# Altium PCB teensy_base.PcbDoc
Units mil, origin at the board's own origin, x right, y up, seen from the top; angles counter-clockwise.
Board outline 3937.01 x 3149.61 mil, 2 copper layers (Top, Bottom); 7 components, 8 nets, 116 pads, 0 vias.
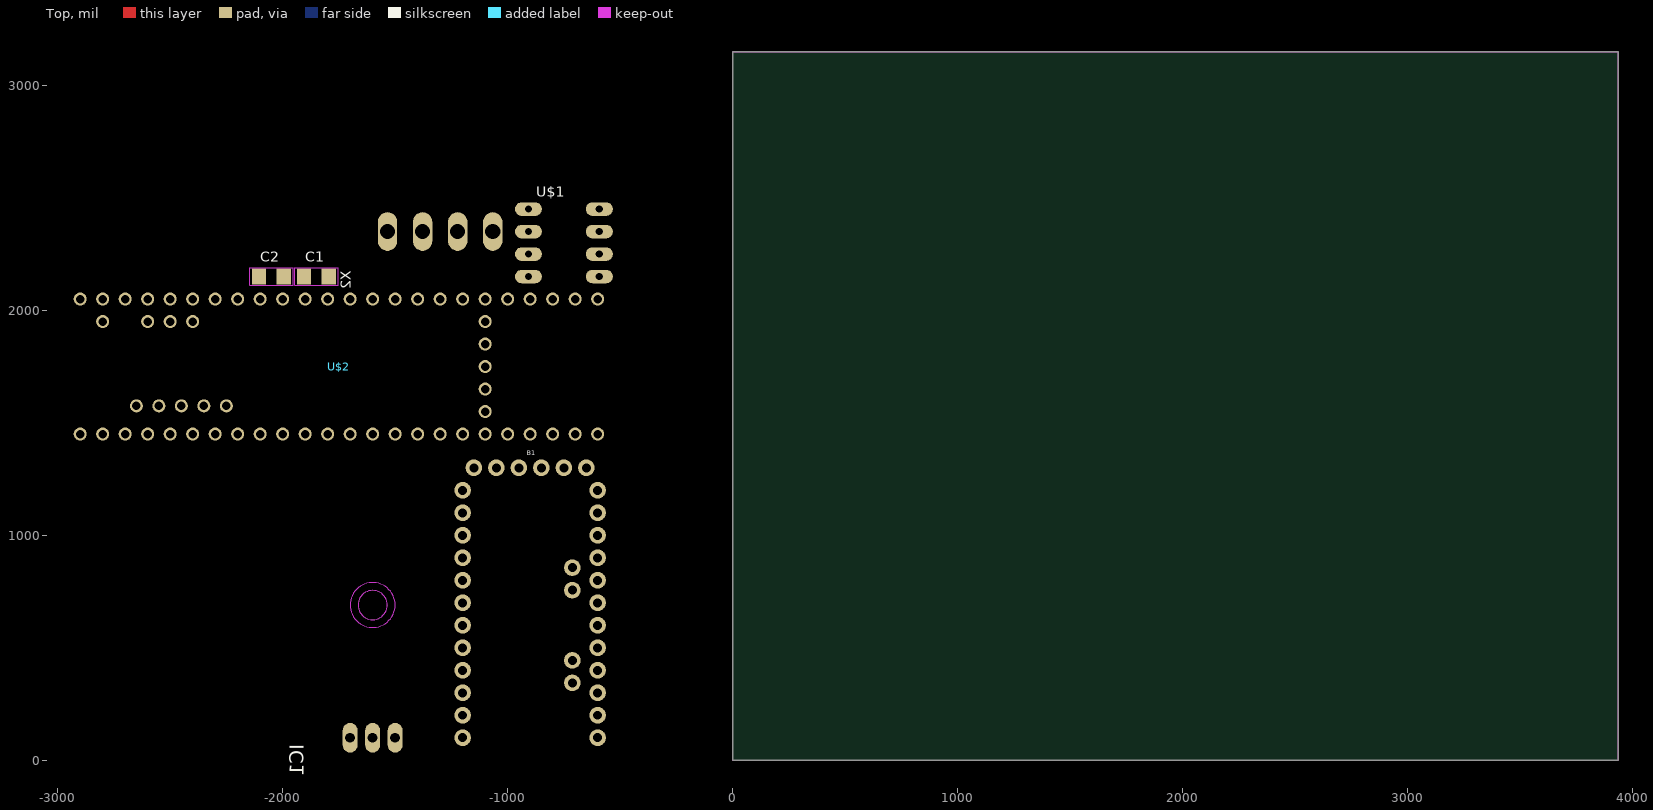
[diagram p0: Top view]
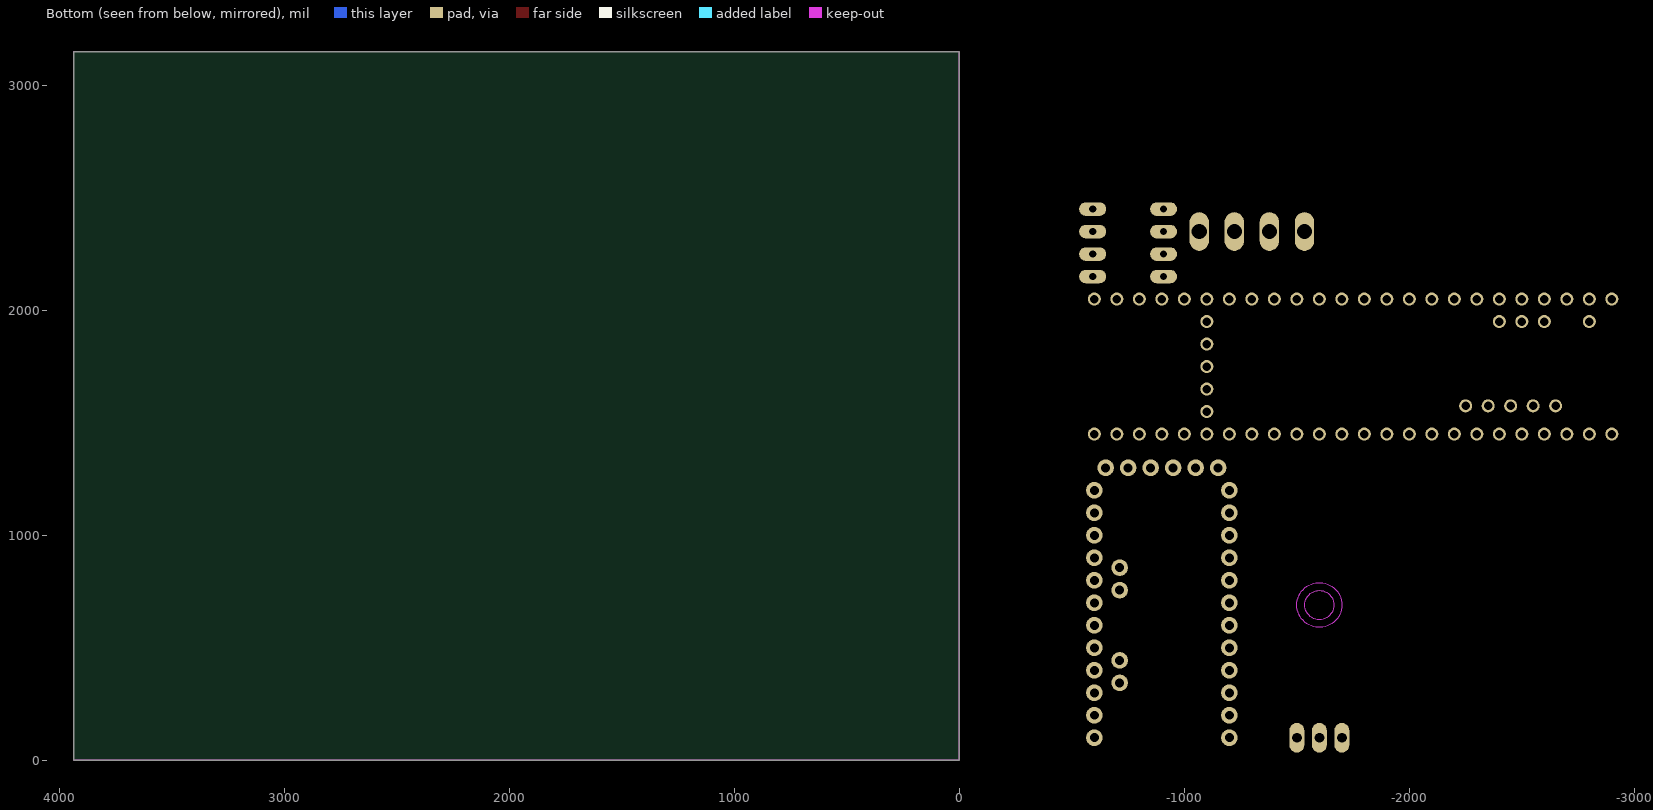
[diagram p1: Bottom view, seen from below]

## Layer stack, top to bottom
Top Solder: solder mask 0.4, Solder Resist, Dk 3.5
Top: signal copper 1.378
Dielectric 1: dielectric 12.6, FR-4, Dk 4.8
Bottom: signal copper 1.378
Bottom Solder: solder mask 0.4, Solder Resist, Dk 3.5

## Board outline
0,3149.61 0,0 3937.01,0 3937.01,3149.61
cut-out: -1600,625 ccw(c-1600,690) -1535,690 ccw(c-1600,690) -1600,755 ccw(c-1600,690) -1665,690 ccw(c-1600,690)

## Design rules (kind name [scope] priority, off if disabled: settings)
BoardOutlineClearance mdCopperDimension [All] p1: gap=10 ignorepadtopadclearanceinfootprint=FALSE except(0: Arc-SplitContinuation Track-SplitContinuation SMDPad-SplitContinuation THPad-SplitContinuation Via-SplitContinuation Fill-SplitContinuation Poly-SplitContinuation Region-SplitContinuation Text-SplitContinuation; 40: Poly-OutlineEdge Poly-CavityEdge Poly-CutoutEdge Poly-SplitBarrior)
Clearance "Clearance (Same Net)" [All] p1: gap=6 ignorepadtopadclearanceinfootprint=FALSE
Clearance [All] p2: gap=6 ignorepadtopadclearanceinfootprint=FALSE
HoleSize [All] p1: absolutevalues=TRUE maxlimit=100000 minlimit=13.78 maxpercent=80.000 minpercent=20.000
HoleToHoleClearance mdDrill [All] p1: gap=6 allowstackedmicrovias=TRUE
MinimumSolderMaskSliver [All] p1 off: minsoldermaskwidth=10
PasteMaskExpansion mlMinCreamFrame [All] p1: expansion=0
PolygonConnect ThermalVias [IsVia] p1: connectstyle=Direct reliefconductorwidth=10 reliefentries=4 polygonreliefangle="90 Angle" airgapwidth=10
PolygonConnect [All] p2: connectstyle=Relief reliefconductorwidth=10 reliefentries=4 polygonreliefangle="90 Angle" airgapwidth=10
RoutingVias [All] p1: holewidth=13.78 width=29.78 viastyle="Through Hole" minholewidth=13.78 minwidth=29.78 maxholewidth=100 maxwidth=100
SolderMaskExpansion mlMinStopFrame [All] p1: expansion=4 istentingtop=FALSE
Width [All] p1: maxlimit=10 minlimit=6 preferedwidth=6
26 further rules are at their usual default settings.

## Components (designator, comment, footprint, x,y, rotation, side; value= is the part's Value field where it differs from the comment)
B1 "ARDUINO_PRO_MINI" ARDUINO_PRO_MINI -900,700 r0 top
C1 "" C1206 -1850,2150 r0 top
C2 "" C1206 -2050,2150 r0 top
IC1 "7805T" TO220H -1600,500 r0 top
U$1 "" MCP2561_PDIP -750,2300 r0 top
U$2 "" TEENSY_3.5/3.6 -1800,1750 r0 top
X2 "" KK-156-4 -1300,2350 r0 top

## Footprints (in the part's own frame and the unit in brackets; to place one, negate y for a bottom-side part, rotate by r counter-clockwise, add the part's x,y. Pads: shape width x height; smd on the part's side, far side on the other; paste and mask are expansions set on the pad)
ARDUINO_PRO_MINI [mil] "ARDUINO_PRO_MINI"
  round 74 hole 40: 1(-300,500) 2(-300,400) 3(-300,300) 4(-300,200) 5(-300,100) 6(-300,0) 7(-300,-100) 8(-300,-200) 9(-300,-300) 10(-300,-400) 11(-300,-500) 12(-300,-600) 13(300,-600) 14(300,-500) 15(300,-400) 16(300,-300) 17(300,-200) 18(300,-100) 19(300,0) 20(300,100) 21(300,200) 22(300,300) 23(300,400) 24(300,500) A4(187.5,56.25) A5(187.5,156.25) A6(187.5,-356.25) A7(187.5,-256.25) BLK(-250,600) GND(-150,600) GRN(250,600) RXI(50,600) TXO(150,600) VCC(-50,600)
C1206 [mil] "C1206"
  rect 62.99x70.87 smd: 1(-55.12,0) 2(55.12,0)
  Top keep-out lines w2: -97.36,-38.7 -97.36,38.7 97.36,38.7 97.36,-38.7 -97.36,-38.7
KK-156-4 [mil] "KK-156-4"
  oval 86x172 hole 66.93: 1(-233.86,0) 2(-77.95,0) 3(77.95,0) 4(233.86,0)
MCP2561_PDIP [mil] "MCP2561_PDIP"
  oval 120x60 hole 32: CANH(157.48,50) CANL(157.48,-50) RXD(-157.48,-150) SPLIT(157.48,-150) STBY(157.48,150) TXD(-157.48,150) VDD(-157.48,-50) VSS(-157.48,50)
TEENSY_3.5/3.6 [mil] "TEENSY_3.5/3.6"
  round 58 hole 38: 0/RX(-1000,-300) 1/TX(-900,-300) 2(-800,-300) 3/CANTX(-700,-300) 3V3(300,-300) 3V3_2(700,-100) 3V3_LO(-900,300) 4/CANRX(-600,-300) 5(-500,-300) 6(-400,-300) 7(-300,-300) 8(-200,-300) 9/CS(-100,-300) 10/CS(0,-300) 11/MOSI(100,-300) 12/MISO(200,-300) 13/SCK(200,300) 14/A0(100,300) 15/A1(0,300) 16/A2(-100,300) 17/A3(-200,300) 18/A4/SDA(-300,300) 19/A5/SCL(-400,300) 20/A6(-500,300) 21/A7(-600,300) 21/DAC0(500,300) 22/A8(-700,300) 23/A9(-800,300) 24(400,-300) 25(500,-300) 26(600,-300) 27(700,-300) 28(800,-300) 29(900,-300) 30(1000,-300) 31/A12(1100,-300) 32/A13(1200,-300) 33/A14(1200,300) 34/A15(1100,300) 35/A16(1000,300) 36/A17(900,300) 37/A18(800,300) 38/A19(700,300) 39/A20(600,300) A10(-700,200) A11(-600,200) A22/DAC1(400,300) AGND(-1000,300) AREF(-800,200) GND(-1100,-300) GND2(300,300) GND3(700,0) PROG(700,100) RESET(700,200) U5V(-850,-175) UD+(-650,-175) UD-(-750,-175) UGND1(-550,-175) UGND2(-450,-175) VBAT(700,-200) VIN(-1100,300) VUSB(-1000,200)
TO220H [mil] "TO220H"
  oval 66x132 hole 44: 1(-100,-400) 2(0,-400) 3(100,-400)
  Top keep-out circle w0: c0,190 r100
  Bottom keep-out circle w0: c0,190 r100

## Part data
C1 C2: library part C1206, PackageName=C1206
IC1: library part TO220H, PackageName=TO220H
U$1: library part MCP2561_PDIP, PackageName=MCP2561_PDIP
U$2: library part TEENSY_3.5/3.6, PackageName=TEENSY_3.5/3.6
X2: library part KK-156-4, PackageName=KK-156-4
B1: PackageName=ARDUINO_PRO_MINI

## Free pads (board coordinates)
  round 130 hole 130 unplated: MH1(-1600,690)

## Nets (pads, with @x,y where several pads share a name; then routed paths per layer and width w, separated by ;. In a path a pad name is that pad's centre, name@x,y a point inside that pad or via, vN(x,y) a via of type N, cw(c..) or ccw(c..) an arc to the next point about the centre after c; other vN are vias at no path point)
+5V: B1.21 C2.1 IC1.3 U$1.VDD U$2.VIN
+12V: C1.1 IC1.1 X2.1
GND: B1.4 B1.23 C1.2 C2.2 IC1.2 U$1.STBY U$1.VSS U$2.AGND U$2.GND X2.2
N$1: U$1.RXD U$2.4/CANRX
N$2: U$1.TXD U$2.3/CANTX
N$5: U$1.CANH X2.3
N$6: U$1.CANL X2.4
RAW: B1.24
pads on no net: B1.1 B1.2 B1.3 B1.5 B1.6 B1.7 B1.8 B1.9 B1.10 B1.11 B1.12 B1.13 B1.14 B1.15 B1.16 B1.17 B1.18 B1.19 B1.20 B1.22 B1.A4 B1.A5 B1.A6 B1.A7 B1.BLK B1.GND B1.GRN B1.RXI B1.TXO B1.VCC U$1.SPLIT U$2.0/RX U$2.1/TX U$2.2 U$2.3V3 U$2.3V3_2 U$2.3V3_LO U$2.5 U$2.6 U$2.7 U$2.8 U$2.9/CS U$2.10/CS U$2.11/MOSI U$2.12/MISO U$2.13/SCK U$2.14/A0 U$2.15/A1 U$2.16/A2 U$2.17/A3 U$2.18/A4/SDA U$2.19/A5/SCL U$2.20/A6 U$2.21/A7 U$2.21/DAC0 U$2.22/A8 U$2.23/A9 U$2.24 U$2.25 U$2.26 U$2.27 U$2.28 U$2.29 U$2.30 U$2.31/A12 U$2.32/A13 U$2.33/A14 U$2.34/A15 U$2.35/A16 U$2.36/A17 U$2.37/A18 U$2.38/A19 U$2.39/A20 U$2.A10 U$2.A11 U$2.A22/DAC1 U$2.AREF U$2.GND2 U$2.GND3 U$2.PROG U$2.RESET U$2.U5V U$2.UD+ U$2.UD- U$2.UGND1 U$2.UGND2 U$2.VBAT U$2.VUSB

## Keep-outs
Keep-Out Layer:
  the board outline again, w0

## Silkscreen, mask and mechanical layers (free items; w line width, h text height)
Dimension:
  the board outline again, w0
Unrouted:
  lines w0: -2900,1450 -2800,2050 -1994.88,2150 -1794.88,2150 -1377.95,2350 -907.48,2350 ; -2900,2050 -2105.12,2150 -907.48,2250 -600,900 -1500,100 ; -2500,1450 -907.48,2450 ; -2400,1450 -907.48,2150 ; -1700,100 -1905.12,2150 -1533.86,2350 ; -1600,100 -1200,900 -600,1100 -907.48,2350 ; -1222.05,2350 -592.52,2350 ; -1066.14,2350 -592.52,2250 ; -592.52,2450 -907.48,2350

## Text inside footprints (layer, text, board x,y; h text height)
U$1: tPlace "TXD" at -948.65,2490.37 h49.6
U$2: tPlace "3.6" at -1693.75,1706.25 h108.5; tPlace "TEENSY" at -1693.75,1793.75 h108.5